# Altium PCB sheet2.PcbDoc
Units mm, origin at the board's own origin, x right, y up, seen from the top; angles counter-clockwise.
Board outline 50.13 x 51.93 mm, 2 copper layers (Top Layer, Bottom Layer); 47 components, 37 nets, 178 pads, 65 vias.
Unrouted connection lines stored in the file: 3.
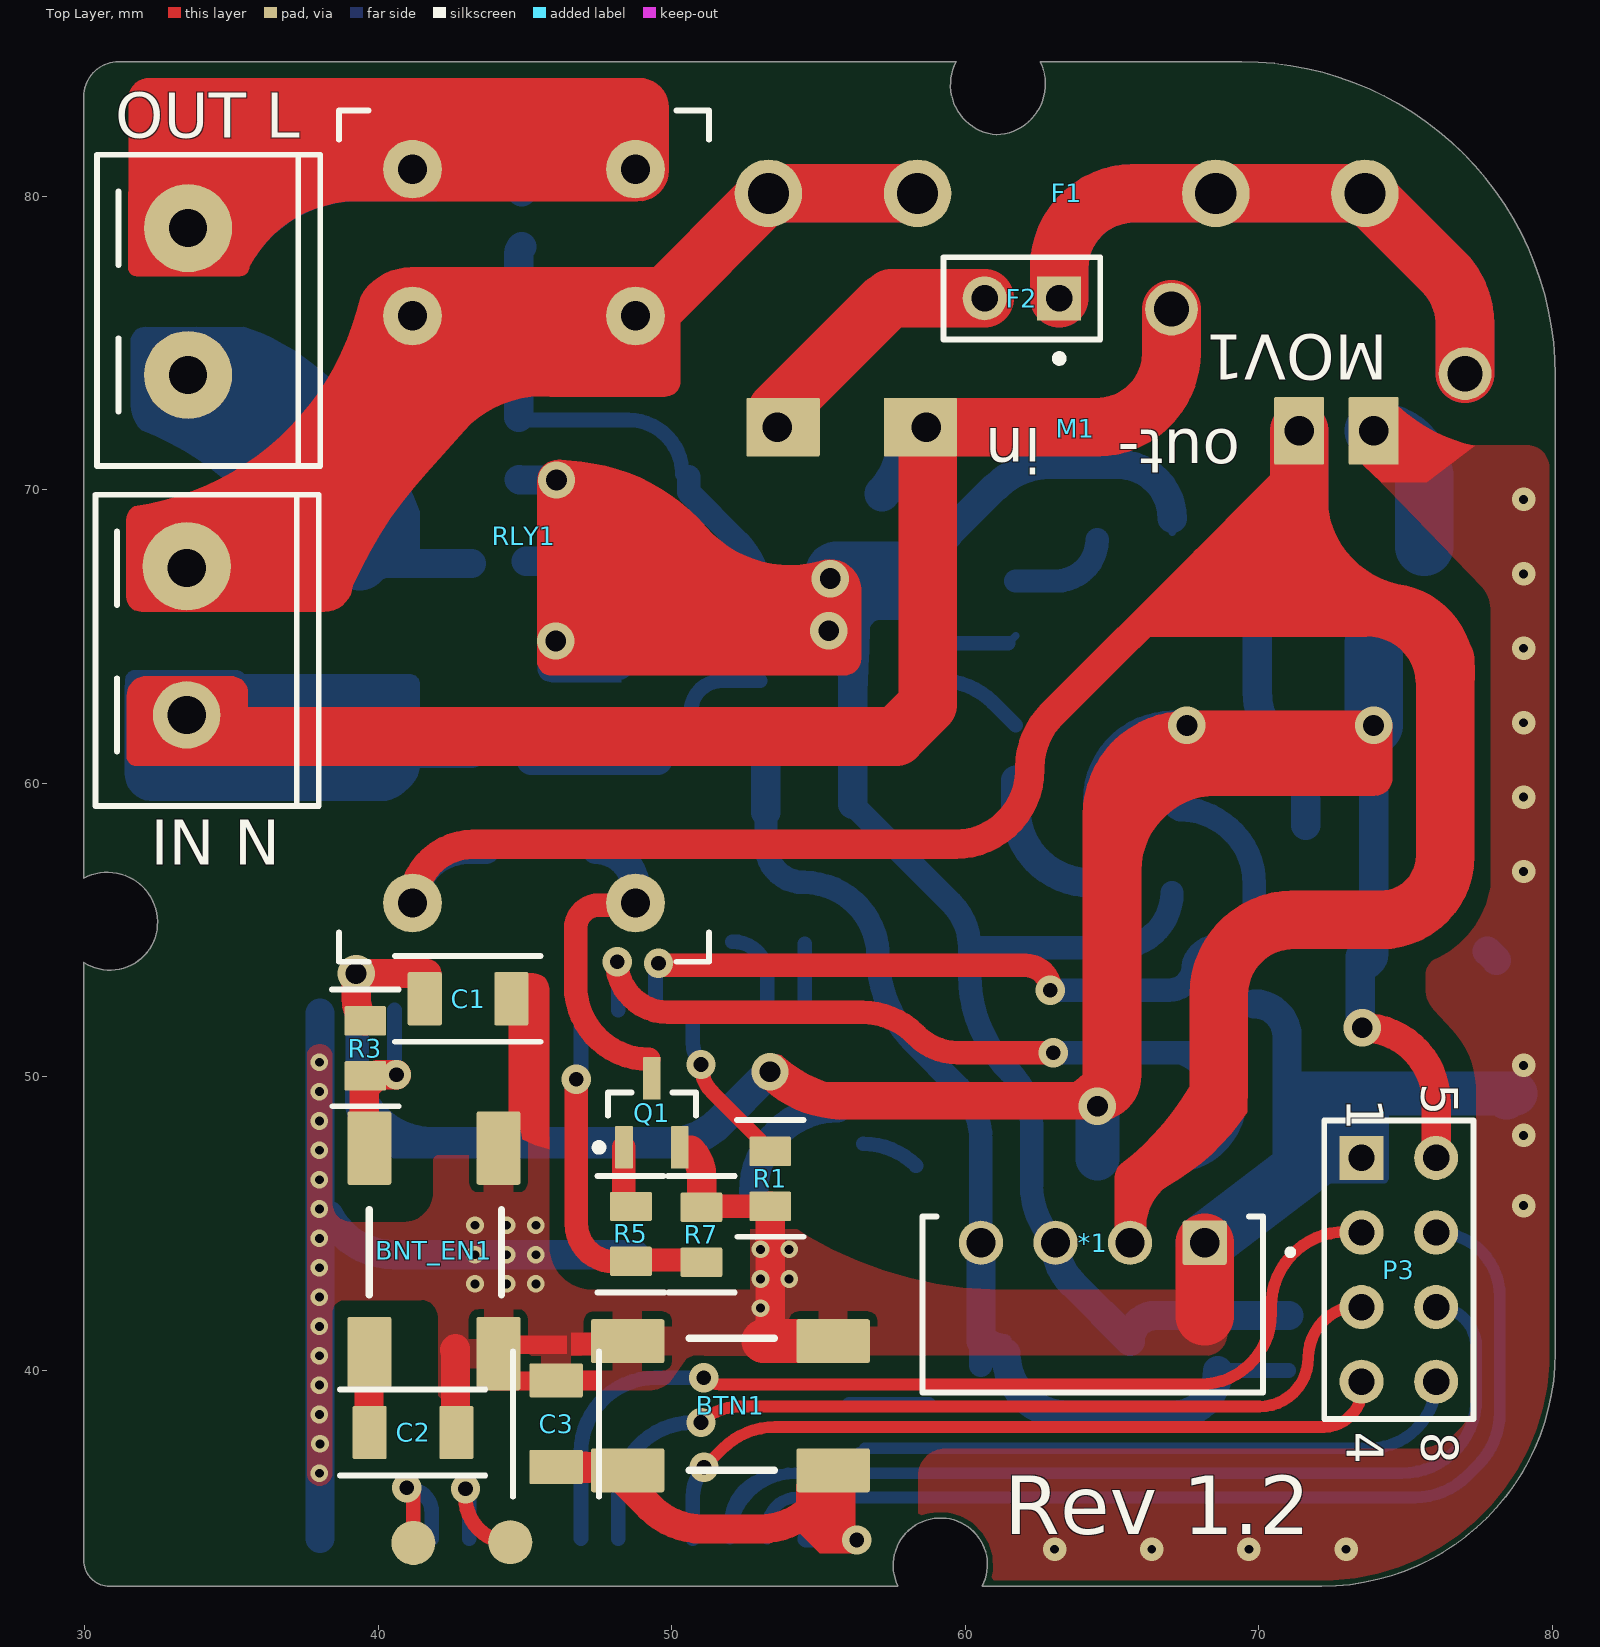
[diagram p0: Top Layer view]
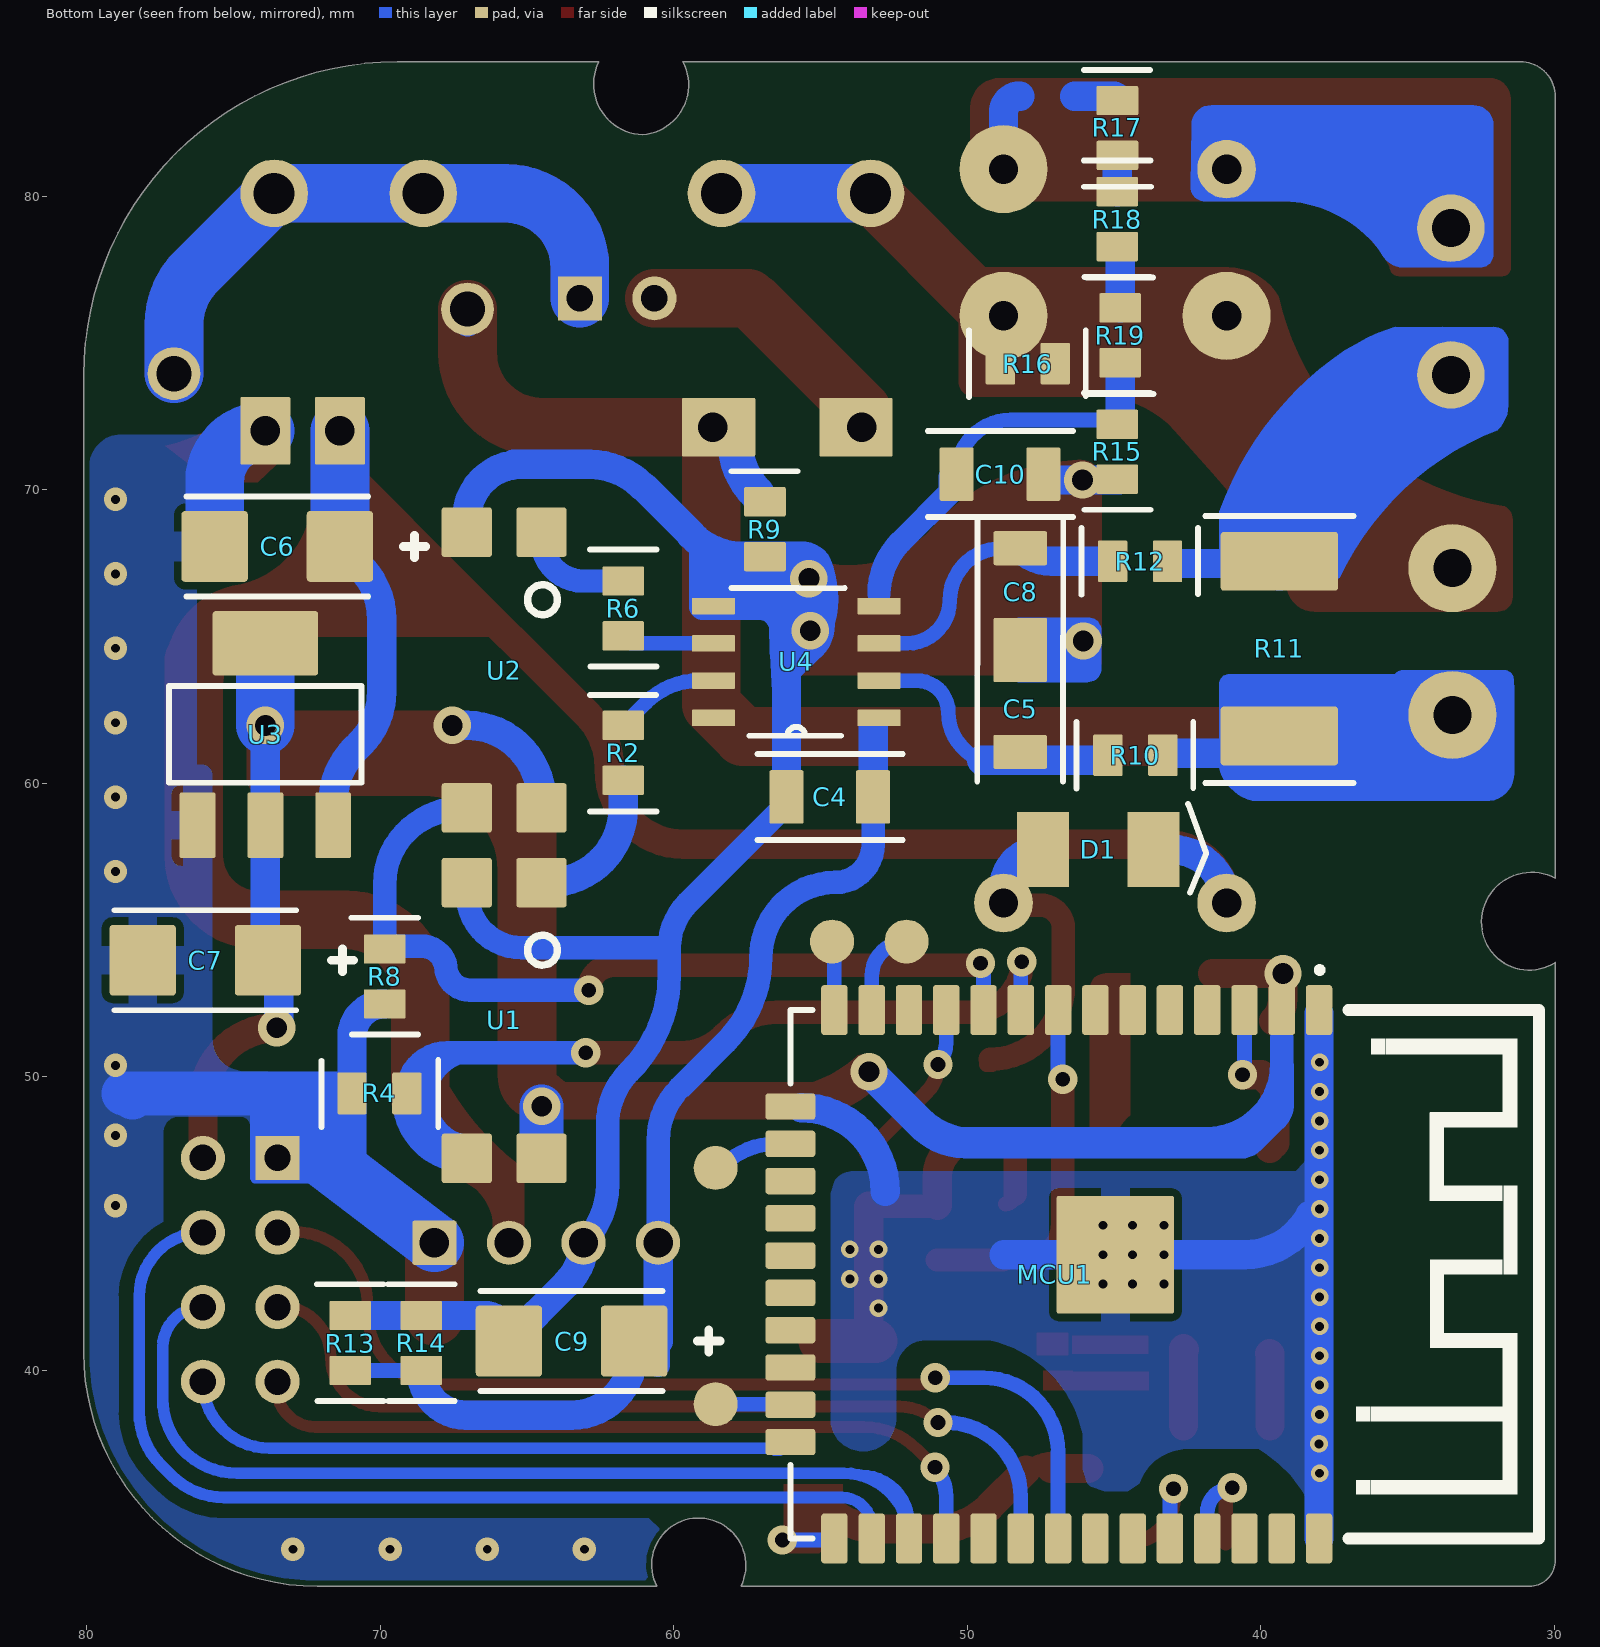
[diagram p1: Bottom Layer view, seen from below]

## Layer stack, top to bottom
Top Solder: solder mask 0.0102, Solder Resist, Dk 3.5
Top Layer: signal copper 0.0356
Dielectric 1: dielectric 0.32, FR-4, Dk 4.8
Bottom Layer: signal copper 0.0356
Bottom Solder: solder mask 0.0102, Solder Resist, Dk 3.5

## Board outline
30.922,32.653 57.709,32.653 cw(c59.161,33.36) 59.219,34.974 cw(c59.161,33.381) 60.579,32.653 72.15,32.65 ccw(c72.15,40.6) 80.1,40.6 80.1,73.9 ccw(c69.418,73.9) 69.418,84.582 62.56,84.582 cw(c60.992,83.831) 61.062,82.093 cw(c61.202,83.793) 59.69,84.582 31.157,84.582 ccw(c31.157,83.397) 29.972,83.397 29.972,56.769 cw(c30.779,55.263) 32.487,55.296 cw(c30.858,55.265) 29.972,53.899 29.972,33.528 ccw(c30.85,33.528)

## Design rules (kind name [scope] priority, off if disabled: settings)
BoardOutlineClearance [All] p1: gap=0.2 ignorepadtopadclearanceinfootprint=FALSE except(0.4: Arc-SplitBarrior Arc-SplitContinuation Track-SplitBarrior Track-SplitContinuation SMDPad-SplitBarrior SMDPad-SplitContinuation THPad-SplitBarrior THPad-SplitContinuation Via-SplitBarrior Via-SplitContinuation Fill-SplitBarrior Fill-SplitContinuation Poly-SplitBarrior Poly-SplitContinuation Region-SplitBarrior Region-SplitContinuation Text-SplitBarrior Text-SplitContinuation)
Clearance "Clearance Bottom Layer" [OnLayer('Bottom Layer')] p1: gap=0.203 ignorepadtopadclearanceinfootprint=TRUE except(0.254: Arc-Text Track-Text SMDPad-Text THPad-Text Via-Text Fill-Text Poly-Text Region-Text Text-Text; 0.5: Arc-Poly Track-Poly)
Clearance "Clearance Top Layer" [OnLayer('Top Layer')] p2: gap=0.203 ignorepadtopadclearanceinfootprint=TRUE except(0.254: Arc-Text Track-Text SMDPad-Text THPad-Text Via-Text Fill-Text Poly-Text Region-Text Text-Text; 0.5: Arc-Poly Track-Poly)
Clearance [All] p3: gap=0.2 ignorepadtopadclearanceinfootprint=FALSE except(0.089: Arc-Arc Arc-Track Arc-SMDPad Track-Track Track-SMDPad SMDPad-SMDPad; 0.127: Arc-Via Track-Via SMDPad-Via THPad-Via Via-Via; 0.254: Arc-Text Track-Text SMDPad-Text THPad-Text Via-Text Fill-Text Poly-Text Region-Text Text-Text)
HoleSize [All] p1: absolutevalues=TRUE maxlimit=6.3 minlimit=0.2 maxpercent=80.000 minpercent=20.000
MinimumAnnularRing [All] p1: minimumring=0.076
MinimumSolderMaskSliver [All] p1: minsoldermaskwidth=0.1
PlaneConnect [All] p1: pad.planeconnectstyle=Relief pad.reliefexpansion=0.508 pad.reliefentries=4 pad.reliefconductorwidth=0.5 pad.reliefairgap=0.254 via.planeconnectstyle=Direct via.reliefexpansion=0.508 via.reliefentries=4 via.reliefconductorwidth=0.4 via.reliefairgap=0.254
PolygonConnect PolygonConnect_1 [All] p1: thpad.connectstyle=Relief thpad.reliefconductorwidth=0.508 thpad.reliefentries=4 thpad.polygonreliefangle="90 Angle" thpad.airgapwidth=0.254 smdpad.connectstyle=Relief smdpad.reliefconductorwidth=1 smdpad.reliefentries=4 smdpad.polygonreliefangle="90 Angle" smdpad.airgapwidth=0.254 via.connectstyle=Direct via.reliefconductorwidth=0.508 via.reliefentries=4 via.polygonreliefangle="90 Angle" via.airgapwidth=0.254
RoutingCorners [All] p1: cornerstyle=Round minsetback=2.54 maxsetback=2.54
RoutingVias [All] p1: holewidth=0.5 width=1 viastyle="Through Hole" minholewidth=0.2 minwidth=0.45 maxholewidth=1 maxwidth=2
SilkToSilkClearance [All] p1: silktosilkclearance=0.1
SilkToSolderMaskClearance [IsPad] p1: minsilkscreentomaskgap=0.1 clearancetoexposedcopper=TRUE
SolderMaskExpansion [All] p1: expansion=0.102
Width [All] p1: maxlimit=6 minlimit=0.089 preferedwidth=0.381
24 further rules are at their usual default settings.

## Components (designator, comment, footprint, x,y, rotation, side; value= is the part's Value field where it differs from the comment)
*1 "b0505s-1w" B0505S 64.37,42.275 r180 top
BNT_EN1 "BTN" BUTTON 39.7,40.575 r90 top
BTN1 "BTN" BUTTON 55.5,36.6 r180 top
C1 "Cap Semi" "1206 CAP" 43.075,52.65 r0 top value=100nF
C2 "Cap Semi" "1206 CAP" 41.2,37.875 r0 top value=100nF
C3 "Cap Semi" "1206 CAP" 46.075,38.2 r90 top value=100nF
C4 "Cap Semi" "1206 CAP" 54.7,59.55 r0 bottom value=100nF
C5 "Cap Semi" "1206 CAP" 48.187,62.562 r90 bottom value=100nF
C6 "Cap Pol2" "2312 CAP TANT" 73.508,69.952 r0 bottom value=10uF
C7 "Cap Pol2" "2312 CAP TANT" 75.959,55.855 r0 bottom value=10uF
C8 "Cap Semi" "1206 CAP" 48.184,66.548 r90 bottom value=100nF
C9 "Cap Pol2" "2312 CAP TANT" 63.484,42.88 r0 bottom value=10uF
C10 "Cap Semi" "1206 CAP" 48.9,70.55 r0 bottom value=100nF
D1 "Diode 1N4148" DO214-AC 45.466,57.912 r180 bottom
F1 "0.2 A" "FUSE HOLDER MINI" 53.295,80.1 r0 top
F2 "100 C" PIN2 63.2,76.525 r180 top
"IN N" "Header 2" KF301-2P 33.477,67.332 r270 top (schematic designator P2)
M1 "wx-dc12003" WX-DC12003_HORIZ 73.914,71.628 r180 top
MCU1 "esp32-wroom" ESP32-WROOM 45.593,44.069 r270 bottom
MOV1 "Res Varistor" S20K250 66.802,73.406 r0 top
"OUT L" "Header 2" KF301-2P 33.528,78.914 r270 top (schematic designator P1)
P3 "Header 4X2A" HDR2X4_CEN 73.5,47.24 r270 top
Q1 "2n7002" SOT23 49.325,48.775 r90 top
R1 "Res2" "0805 RES" 53.294,46.555 r270 top value=0
R2 "Res2" "0805 RES" 61.659,61.014 r90 bottom value=1K
R3 "Res2" "0805 RES" 39.5,51 r270 top value=1K
R4 "Res2" "0805 RES" 70,49.5 r0 bottom value=1K
R5 "Res2" "0805 RES" 48.675,44.625 r90 top value=300R
R6 "Res2" "0805 RES" 61.785,65.986 r270 bottom value=1K
R7 "Res2" "0805 RES" 50.95,44.65 r270 top value=10K
R8 "Res2" "0805 RES" 69.913,53.448 r270 bottom value=1K
R9 "Res2" "0805 RES" 56.833,68.634 r90 bottom value=0
R10 "Res2" "0805 RES" 44.304,60.897 r180 bottom value=1K
R11 "Res2" "2512 RES" 39.37,67.739 r270 bottom value=0.001R
R12 "Res2" "0805 RES" 44.142,67.501 r180 bottom value=1K
R13 "21ma load" "0805 RES" 71.088,40.962 r270 bottom value=470R
R14 "Res2" "0805 RES" 68.663,40.962 r270 bottom value=470R
R15 "Res2" "0805 RES" 44.958,71.323 r270 bottom value=1K
R16 "Res2" "0805 RES" 47.967,74.237 r180 bottom value=470K
R17 "Res2" "0805 RES" 44.825,82.3 r90 bottom value=470K
R18 "Res2" "0805 RES" 44.958,79.248 r270 bottom value=470K
R19 "Res2" "0805 RES" 44.73,75.238 r90 bottom value=470K
RLY1 "relay" SMIH-05VDC-SL-A 41.168,55.925 r90 top
U1 "Optoisolator1" PC817-SMD 68.072,55.118 r270 bottom
U2 "Optoisolator1" PC817-SMD 68.072,67.056 r270 bottom
U3 "ams1117" AMS1117 73.973,61.711 r180 bottom
U4 "hlw8032" HLW8032 55.478,60.822 r0 bottom

## Footprints (in the part's own frame and the unit in brackets; to place one, negate y for a bottom-side part, rotate by r counter-clockwise, add the part's x,y. Pads: shape width x height; smd on the part's side, far side on the other; paste and mask are expansions set on the pad)
"0805 RES" [mm]
  rrect10% 1x1.42 smd: 1(-0.908,0.063) 2(0.962,0.063)
  silkscreen extent -1.98,-1.08 2,1.2, body extent -1.02,-0.52 0.98,0.68, height 1.6
"1206 CAP" [mm]
  rrect10% 1.16x1.82 smd: 1(-1.487,0.013) 2(1.463,0.013)
  silkscreen extent -2.5,-1.45 2.45,1.48, body extent -1.71,-0.86 1.66,0.91, height 1.6
"2312 CAP TANT" [mil]
  rrect10% 89x95 smd: 1(-84,74.02) 2(84,74.02)
  silkscreen extent -199,7 122,141, body extent -118,10 118,138, height 102
"2512 RES" [mm]
  rrect10% 2x4 smd: 1(0.175,0) 2(6.125,0)
  silkscreen extent -1.37,-2.52 7.73,2.52, body extent 0,-1.6 6.3,1.6, height 1.6
AMS1117 [mil]
  rrect10% 48x88 smd: 1(-88.68,-123.57) 2(2.32,-123.57) 3(93.32,-123.57)
  rrect10% 141.73x86.61 smd: 2(2.32,120.43)
  silkscreen extent -127,-67 131,63, body extent -128,-136 128,134, height 79
B0505S [mm]
  rrect10% 1.508x1.508 hole 1: 1(-3.785,-2.075)
  round 1.508 hole 1: 2(-1.245,-2.075) 3(1.295,-2.075) 4(3.835,-2.075)
  silkscreen extent -6.81,-2.97 5.83,3.03, body extent -5.79,-2.75 5.82,2.83, height 10
BUTTON [mm]
  rrect10% 2.5x1.5 smd: 1(0,0) 1(7,0) 2(0,-4.4) 2(7,-4.4)
  silkscreen extent 2,-4.5 4.9,0, body extent 0.35,-5.35 6.6,0.9, height 2.6
DO214-AC [mm]
  rect 1.78x2.54 smd: 1(-1.956,-0.165) 2(1.804,-0.165)
  silkscreen extent 2.99,-1.63 3.61,1.39, body extent -1.96,-1.02 2.06,0.67, height 2.1
ESP32-WROOM [mm]
  rrect22% 1.7x0.9 smd: 1(-8.208,7.574) 2(-8.208,6.304) 3(-8.208,5.034) 4(-8.208,3.764) 5(-8.208,2.494) 6(-8.208,1.224) 7(-8.208,-0.046) 8(-8.208,-1.316) 9(-8.208,-2.586) 10(-8.208,-3.856) 11(-8.208,-5.126) 12(-8.208,-6.396) 13(-8.208,-7.666) 14(-8.208,-8.936) 25(9.792,-8.936) 26(9.792,-7.666) 27(9.792,-6.396) 28(9.792,-5.126) 29(9.792,-3.856) 30(9.792,-2.586) 31(9.792,-1.316) 32(9.792,-0.046) 33(9.792,1.224) 34(9.792,2.494) 35(9.792,3.764) 36(9.792,5.034) 37(9.792,6.304) 38(9.792,7.574)
  rrect3% 4x4 smd: 1.1(0.127,0.635)
  rrect22% 0.9x1.7 smd: 15(-4.923,-10.436) 16(-3.653,-10.436) 17(-2.383,-10.436) 18(-1.113,-10.436) 19(0.157,-10.436) 20(1.427,-10.436) 21(2.697,-10.436) 22(3.967,-10.436) 23(5.237,-10.436) 24(6.507,-10.436)
  silkscreen extent -9.67,-10.43 9.79,15.07, body extent -8.4,-10.27 9.9,15.26, height 2
"FUSE HOLDER MINI" [mm]
  round 2.3 hole 1.4: 1(0,0) 1(5.08,0) 2(15.24,0) 2(20.32,0)
  body extent -0.25,-2.75 20.49,2.75, height 10.5
HDR2X4_CEN [mm] "Connector; Header; 4x2 Position"
  rect 1.5x1.5 hole 0.9: 1(0,0)
  round 1.5 hole 0.9: 2(2.54,0) 3(5.08,0) 4(7.62,0) 5(0,2.54) 6(2.54,2.54) 7(5.08,2.54) 8(7.62,2.54)
  silkscreen extent -1.27,-1.27 8.89,3.81
HLW8032 [mil]
  rrect10% 58x22 smd: 1(-97.18,-55.43) 2(-97.18,-105.43) 3(-97.18,-155.43) 4(-97.18,-205.43) 5(124.82,-205.43) 6(124.82,-155.43) 7(124.82,-105.43) 8(124.82,-55.43)
  silkscreen extent -51,-229 78,-31, body extent -64,-230 91,-32, height 59
KF301-2P [mm]
  round 2.3 hole 1.3: 1(0,0) 2(5,0)
  silkscreen extent -2.5,-3.1 8.1,4.5, body extent -2.5,-3.1 8.1,4.5, height 11
PC817-SMD [mm]
  rrect10% 1.68x1.71 smd: 1(-1.5,3.56) 2(-1.5,1.02) 3(7.89,1.02) 4(7.89,3.56)
  silkscreen extent 0.29,3.09 1.31,4.11, body extent 0,0 6.5,4.6, height 3.5
PIN2 [mm]
  rect 1.5x1.5 hole 0.9: 1(0,0)
  round 1.5 hole 0.9: 2(2.54,0)
  silkscreen extent -1.4,-1.4 3.94,2.17
S20K250 [mm]
  round 1.8 hole 1.2: 1(10.225,0.55) 2(0.225,2.75)
  body extent -3.6,0.05 13.4,3.25, height 20.5
SMIH-05VDC-SL-A [mm]
  round 2 hole 1: 0(0,-7.6) 1(0,0) 2(20,-7.6) 2(20,0) 3(25,-7.6) 3(25,0)
  silkscreen extent -2,-10.1 27,2.5, body extent -2,-10.07 27,2.53, height 21
SOT23 [mm]
  rrect10% 1.45x0.6 smd: 1(-1.175,0.95) 2(-1.175,-0.95) 3(1.175,0)
  silkscreen extent -1.3,-1.5 0.7,1.92, body extent -0.7,-1.5 0.7,1.5, height 1.1
WX-DC12003_HORIZ [mm]
  rrect5% 1.7x2.3 hole 1: 1(0,-0.381) 2(2.54,-0.381)
  rrect5% 2.5x2 hole 1 copper offset 0.2,0: 3(15.24,-0.508)
  rrect5% 2.5x2 hole 1 copper offset -0.2,0: 4(20.32,-0.508)
  body extent -2,-1.72 21.47,16.78, height 11.6

## Part data
C1 C2 C3 C4 C5 C8 C10: "Capacitor (Semiconductor SIM Model)", LatestRevisionDate=29-May-2009, LatestRevisionNote="IPC-7351 Footprint Added.", PackageDescription="Chip Capacitor", Published=8-Jun-2000, Publisher="Altium Limited"
C6 C7 C9: "Polarized Capacitor (Axial)", LatestRevisionDate=17-Jul-2002, LatestRevisionNote="Re-released for DXP Platform.", PackageDescription="Polarized Capacitor; 2 Leads", PackageReference=POLAR0.8, Published=8-Jun-2000, Publisher="Altium Limited"
D1: "High Conductance Fast Diode", Code_JEDEC=DO-204-AH, ComponentLink1Description="Manufacturer Link", ComponentLink1URL=http://www.fairchildsemi.com/, ComponentLink2Description=Datasheet, ComponentLink2URL=http://www.fairchildsemi.com/ds/1N%2F1N4148.pdf, DatasheetVersion=1997, LatestRevisionDate=17-Jul-2002, LatestRevisionNote="Re-released for DXP Platform.", PackageDescription="Diode, Axial; Body 3.8 x 1.9 mm (LxDia. max), Lead Dia. 0.53 mm (max)", PackageReference=DO-35, Published=8-Jun-2000, Publisher="Altium Limited"
F1 F2: library part "Fuse 2", "Fuse", LatestRevisionDate=17-Jul-2002, LatestRevisionNote="Re-released for DXP Platform.", PackageDescription="Thru-Hole; 2 Leads", PackageReference=PIN-W2/E2.8, Published=8-Jun-2000, Publisher="Altium Limited"
"IN N" "OUT L": "Header, 2-Pin", LatestRevisionDate=17-Jul-2002, LatestRevisionNote="Re-released for DXP Platform.", Publisher="Altium Limited"
MOV1: "Varistor (Voltage-Sensitive Resistor)", Code_IPC=RESC2012, LatestRevisionDate=29-May-2009, LatestRevisionNote="IPC-7351 Footprint Added.", PackageDescription="Chip Resistor 0805 Case Size", PackageReference=6-0805, PackageVersion=Mar-2003, Published=24-Mar-1999, Publisher="Altium Limited"
P3: "Header, 4-Pin, Dual row", LatestRevisionDate=17-Jul-2002, LatestRevisionNote="Re-released for DXP Platform.", Publisher="Altium Limited"
Q1: library part MOSFET-N, "N-Channel MOSFET", LatestRevisionDate=17-Jul-2002, LatestRevisionNote="Re-released for DXP Platform.", PackageDescription="TO, Flat Index; 3 In-Line, Axial Leads; Body Dia. 4.6mm; Lead Dia. 0.5 mm (max)", PackageReference=E3, PackageVersion=1995/1996, Published=8-Jun-2000, Publisher="Altium Limited"
R1 R2 R3 R4 R5 R6 R7 R8 R9 R10 R11 R12 R14 R15 R16 R17 R18 R19: "Resistor", LatestRevisionDate=17-Jul-2002, LatestRevisionNote="Re-released for DXP Platform.", PackageDescription="Axial Device, Thru-Hole; 2 Leads; 0.4 in Pin Spacing", PackageReference=AXIAL-0.4, Published=8-Jun-2000, Publisher="Altium Limited"
R13: library part Res2, "20ma minimum load resistor", LatestRevisionDate=17-Jul-2002, LatestRevisionNote="Re-released for DXP Platform.", PackageDescription="Axial Device, Thru-Hole; 2 Leads; 0.4 in Pin Spacing", PackageReference=AXIAL-0.4, Published=8-Jun-2000, Publisher="Altium Limited"
U1 U2: "4-Pin Phototransistor Optocoupler", DatasheetVersion=Nov-2003, LatestRevisionDate=04-Mar-2005, LatestRevisionNote="Sch pins 3 & 4 Swapped.", PackageReference=DIP-4, Published=24-Mar-1999, Publisher="Altium Limited"

## Free pads (board coordinates)
  round 1.5 smd far side: 4(58.575,46.9) 5(58.575,38.85) 31(52.07,54.61) 32(54.61,54.61)
  round 1.5 smd: 12(41.2,34.125) 13(44.5,34.15)
  round 3 smd: 26(33.48,67.396) 26(33.528,73.914) 27(33.528,78.914)
  round 3 smd far side: 28(33.477,67.332) 28(41.168,75.925) 28(48.768,75.925) 28(48.768,80.925) 29(33.477,62.332)

## Via types
v1: diameter 0.6/0.6 (per signal layer), hole 0.3, Top Layer to Bottom Layer, tented both sides, 20 vias
v2: diameter 1, hole 0.5, Top Layer to Bottom Layer, tented both sides, 13 vias
v3: diameter 0.8/0.8 (per signal layer), hole 0.3, Top Layer to Bottom Layer, tented both sides, 13 vias
v4: diameter 1.27, hole 0.711, Top Layer to Bottom Layer, tented both sides, 10 vias
v5: diameter 0.6/0.6 (per signal layer), hole 0.3, Top Layer to Bottom Layer, 9 vias

## Nets (pads, with @x,y where several pads share a name; then routed paths per layer and width w, separated by ;. In a path a pad name is that pad's centre, name@x,y a point inside that pad or via, vN(x,y) a via of type N, cw(c..) or ccw(c..) an arc to the next point about the centre after c; other vN are vias at no path point)
+3V3: C1.1 C7.1 MCU1.2 P3.5 R3.1 U1.4 U2.4 U3.2 | length 82.3
  Top Layer w1: R3.1 cw(c40.319,52.664) 39.25,52.664 v4(39.25,53.525) C1.1@41.65,53.525 ; 54.775,49.35 54.8,49.325 64.175,49.325 v4(64.5,49) 64.5,58.927 cw(c67.549,58.927) v4(67.549,61.976) v4(73.914,61.976) ; v4@73.8,51.675 v4(73.525,51.675) cw(c73.525,49.16) 76.04,49.16 P3.5
  Bottom Layer w0.254: U1.4@64.5,47.24 U1.4
  Bottom Layer w0.5: 39.292,51.333 MCU1.2@39.292,52.277
  Bottom Layer w0.6: 41.829,47.9 41.832,47.9
  Bottom Layer w0.7: 49.748,47.9 ccw(c49.748,50.44) 51.544,48.644 v4@53.275,50.375 ; v4@53.275,50.4 53.35,50.325 v4(53.35,50.175)
  Bottom Layer w0.8: v4(39.25,53.525) v4@39.25,53.75 ; 39.289,51.333 39.289,50.44 ccw(c41.829,50.44) 41.829,47.9 ; MCU1.2 v4@39.289,53.711 ; 41.832,47.9 49.748,47.9 50.521,47.9
  Bottom Layer w1: v4(64.5,49) v4@64.512,48.988 ; U2.4 64.512,59.436 cw(c67.052,59.436) 67.052,61.976 v4(67.549,61.976) ; C7.1@73.457,54.102 73.457,51.743 ccw(c73.525,51.743) v4(73.525,51.675) ; C7.1@73.525,53.8 ccw(c73.525,54.189) 73.914,54.189 73.914,58.572 v4(73.914,61.976)
  Bottom Layer w1.5: U1.4 v4@64.512,48.988
  Bottom Layer w2: v4(73.914,61.976) U3.2@73.914,64.77
+5V: *1.2 C6.1 D1.2 M1.2 RLY1.1 U3.3 | length 87.1
  Top Layer w1: RLY1.1@41.168,55.852 cw(c43.241,55.852) 43.241,57.925 59.66,57.925 ccw(c59.66,60.465) 62.2,60.465 62.2,60.548 cw(c64.74,60.548) 62.944,62.344 68.182,67.582 cw(c69.978,65.786) 69.978,68.326 70.975,68.326 ; *1.2 65.615,46.465 ; 67.012,47.862 ccw(c67.012,49.488) 68.638,49.488 ; 71.374,68.326 70.975,68.326 ; M1.2 ccw(c72.337,71.046) 70.975,71.046 70.975,68.326
  Top Layer w2: 68.638,49.488 68.638,52.81 cw(c71.178,52.81) 71.178,55.35 74.168,55.35 ccw(c74.168,57.534) 76.352,57.534 76.352,64.2 ; 71.374,68.326 M1.2
  Bottom Layer w1: RLY1.1@41.168,55.852 cw(c43.063,55.852) 43.063,57.747 D1.2 ; 70.65,61.375 70.692,61.333 ; C6.1 70.694,67.392 ccw(c72.49,65.596) 70.425,67.075 ccw(c72.49,65.596) 69.95,65.596 69.95,63.127 ccw(c72.49,63.127) 70.678,61.347 ccw(c72.49,63.127) 70.692,61.333 ; U3.3 71.603,59.37 ccw(c69.063,59.37) 70.859,61.166 70.692,61.333
  Bottom Layer w2: C6.1 M1.2
+5V_HLW: *1.4 C4.1 C9.1 R13.2 R14.2 U4.1 | length 38.8
  Bottom Layer w0.5: 56.976,54.624 cw(c54.494,54.085) 57.001,54.494 ; 59.791,49.627 cw(c57.995,47.83) 59.981,49.414 ; C9.1@60.535,41.815 ccw(c61.35,41.815) C9.1 ccw(c63.875,41) C9.1@61.385,40.581 ; R14.2 R13.2
  Bottom Layer w0.8: C4.1@53.213,59.287 53.213,57.907 ccw(c54.494,57.907) 54.494,56.625 cw(c54.494,54.085) 55.033,56.567 cw(c54.494,54.085) 56.976,54.624 ; 57.001,54.494 cw(c54.494,54.085) 57.034,54.085 ccw(c61.142,54.085) 58.237,51.18 59.791,49.627 ; 59.981,49.414 cw(c57.995,47.83) 60.404,48.635 cw(c57.995,47.83) 60.535,47.83 *1.4 ; C9.1@60.535,40.175 C9.1@60.535,41
  Bottom Layer w1: C4.1@53.21,59.012 U4.1@53.21,61.955 ; C9.1@60.535,41 60.535,41.815 *1.4 ; C9.1@61.385,40.581 ccw(c63.491,40.581) 63.491,38.475 67.075,38.475 ccw(c67.075,40) R14.2
CHIP_EN: BNT_EN1.1 C2.1 MCU1.3 R3.2 | length 7.9
  Top Layer w1: C2.1@39.688,38.113 39.688,40.563 BNT_EN1.1@39.7,40.575 ; BNT_EN1.1@39.7,47.575 39.525,47.75 39.525,49.613 39.987,50.075 v2(40.625,50.075)
  Bottom Layer w0.5: v2@40.559,50.271 MCU1.3
espRX: MCU1.34 pad.13 | length 4.3
  Top Layer w0.5: v2(42.975,35.975) 42.975,35.675 ccw(c44.5,35.675) pad.13
  Bottom Layer w0.5: MCU1.34 v2@43.099,35.851
espTX: MCU1.35 pad.12 | length 4.2
  Top Layer w0.5: v2(40.975,36) cw(c40.975,35.775) 41.2,35.775 pad.12
  Bottom Layer w0.5: v2(40.975,36) cw(c40.975,35.146) 41.829,35.146 MCU1.35
GND: *1.1 BNT_EN1.2 BTN1.2 C1.2 C2.2 C3.2 C6.2 C7.2 M1.1 MCU1.1 MCU1.1.1 MCU1.15 MCU1.38 P3.1 Q1.2 R1.2 R4.2 R7.1 R8.2 U3.1 | length 75.7
  Top Layer w0.5: R7.1@51.025,45.593 R7.1@51.025,45.633
  Top Layer w0.8: R7.1@51.025,45.593 R1.2
  Top Layer w1: 42.6,40.7 42.638,40.737 C2.2@42.638,38.113 ; 50.65,47.5 cw(c49.745,46.595) 51.025,46.595 R7.1@51.025,45.633 ; R1.2 53.363,45.587 53.363,43.117 53.363,41.625
  Top Layer w1.5: 53.125,41 BTN1.2@55,41 ; 68.025,41.725 ccw(c68.025,41.855) 68.155,41.855
  Top Layer w2: 68.155,41.855 *1.1
  Bottom Layer w0.254: *1.1@68.01,44.349 *1.1@68.155,44.349
  Bottom Layer w1: MCU1.38 v1(38.019,37.5) 38.019,40.5 38.019,42.5 38.019,48.5 38.019,50.5 MCU1.1@38.019,52.169 ; 38.313,45.295 ccw(c40.559,46.482) 40.559,43.942 v5(43.3,43.942) v5(44.375,43.942) MCU1.1.1 v5(45.375,43.942) 48.75,43.942 ; 52.796,46.096 cw(c55.65,46.096) MCU1.15@55.65,48.95 ; *1.1@68.155,44.349 *1.1@68.561,44.349 ; R8.2 cw(c69.85,51.374) 70.962,51.374 R4.2 70.962,46.75 ; 73.625,49.437 73.823,49.437 ccw(c73.823,49.652) 73.975,49.5 ; C7.2@77.783,54.284 C7.2
  Bottom Layer w1.5: 72.926,47.992 73.625,48.525 ; P3.1@73.625,47.24 73.625,48.525 ; 73.71,49.352 cw(c73.71,49.437) 73.625,49.437 73.625,48.525 ; 73.823,49.437 78.74,49.437 ; 78.384,49.352 cw(c78.384,49.301) 78.435,49.301
  Bottom Layer w2: *1.1 72.926,47.992 ; M1.1 cw(c73.914,70.282) 75.641,70.282 C6.2
  other v1: 38,36.5 38,38.5 38,39.5 38,40.5 38,41.5 53.025,42.125 38,42.5 53.025,43.117 54,43.117 38,43.5 53.025,44.125 54,44.125 38,44.5 38,45.5 38,46.5 38,47.5 38,48.5 38,49.5 38,50.5
  other v3: 63.043,33.909 66.353,33.909 69.664,33.909 72.974,33.909 79.019,45.618 79.019,48.006 79.019,50.394 79.019,56.998 79.019,59.533 79.019,62.067 79.019,64.602 79.019,67.137 79.019,69.672
  other v5: 43.3,42.95 44.375,42.95 45.375,42.95 43.3,44.95 44.375,44.95 45.375,44.95
GND_HLW1: *1.3 C4.2 C5.2 C8.1 C9.2 C10.1 R9.1 R13.1 R14.1 R15.2 U1.2 U2.2 U4.5 | length 67.7
  Top Layer w1: v4@46.075,70.1 v4(46.075,70.333)
  Bottom Layer w0.254: U2.2 U2.2@67.052,69.021 ; R13.1@71.025,41.885 R13.1@71.275,41.885
  Bottom Layer w0.5: R15.2@44.826,70.333 ccw(c44.826,70.43) R15.2 ; v4(55.35,65.2) 55.35,64.875 55.245,64.77 cw(c55.245,63.852) 55.35,64.764 cw(c55.245,63.852) 56.163,63.852 ; 65.455,70.866 cw(c65.455,70.775) 65.519,70.839
  Bottom Layer w0.8: C4.2@56.163,59.287 59.517,55.933 cw(c57.984,54.4) 60.152,54.4 ; *1.3 cw(c65.048,46.323) 62.258,46.323 62.258,48.385 ccw(c59.718,48.385) 61.514,50.181 cw(c64.801,53.469) 60.152,53.469 60.152,54.4 ; U1.2@67.044,56.273 cw(c65.17,56.273) 65.17,54.4 60.152,54.4
  Bottom Layer w1: R15.2@44.809,70.35 44.826,70.333 v4(46.075,70.333) C10.1@46.939,70.333 ; C8.1 C5.2 ; v4@55.35,64.875 55.35,64.764 55.35,64.665 56.163,63.852 56.163,63.15 ; 55.88,64.77 55.88,64.85 cw(c57.095,64.85) 57.095,66.065 58.648,66.065 ccw(c56.988,66.065) R9.1@56.988,67.726 ; C4.2@56.163,59.287 C4.2 56.163,63.15 ; 56.275,65.675 56.252,65.16 56.233,64.726 56.163,63.15 ; 57.622,67.726 ccw(c57.622,70.266) 59.418,68.47 ; 59.368,68.445 61.02,70.097 ; 61.07,70.122 cw(c62.866,68.326) 62.866,70.866 65.455,70.866 ; *1.3 ccw(c65.025,44.35) 63.175,43.733 ccw(c65.025,44.35) 63.646,42.971 C9.2 cw(c66.487,41) 66.487,41.87 R14.1 R13.1 ; 65.519,70.839 cw(c65.207,69.021) U2.2@67.052,69.021
  other v4: 46.05,64.85 55.4,66.975
GPIO0: BTN1.1 C3.1 MCU1.25 | length 14.2
  Top Layer w0.5: 47.065,36.987 cw(c47.065,35.665) BTN1.1@48,36.6 ; 54.799,35.344 55.156,35.701 ccw(c57.54,36.577) 55.744,34.781 v2(56.3,34.225)
  Top Layer w1: C3.1@45.862,36.662 47.14,36.662 ; BTN1.1@48,36.6 49.256,35.344 ccw(c51.052,37.14) 51.052,34.6 53.003,34.6 ccw(c53.003,37.14) 54.799,35.344
  Bottom Layer w0.5: MCU1.25 ccw(c54.581,34.277) 54.581,34.225 v2(56.3,34.225)
GPIO2: MCU1.24 P3.8 | length 21
  Bottom Layer w0.3: MCU1.24@56.379,37.237 MCU1.24@56.575,37.237
  Bottom Layer w0.4: MCU1.24@56.575,37.35 73.77,37.35 ccw(c73.77,39.62) P3.8
GPIO4: MCU1.26 P3.6 | length 34.9
  Bottom Layer w0.4: MCU1.26 53.259,34.659 cw(c54.275,34.659) 53.51,35.328 cw(c54.275,34.659) 54.275,35.675 75.314,35.675 ccw(c75.314,38.215) 77.11,36.419 77.467,36.776 ccw(c75.671,38.572) 78.211,38.572 78.211,42.529 ccw(c76.04,42.529) P3.6
GPIO16: MCU1.27 P3.7 | length 35.7
  Bottom Layer w0.3: P3.7 cw(c76.04,40.375) P3.7@76.614,42.065
  Bottom Layer w0.4: 53.625,36.425 ccw(c53.625,34.789) 51.989,34.789 MCU1.27 cw(c54.212,34.277) 54.212,36.5 74.872,36.5 ccw(c74.872,39.04) 77.412,39.04 77.412,40.788 ccw(c76.04,40.788) P3.7
GPIO17: MCU1.28 P3.4 | length 26.2
  Top Layer w0.4: v2(51.1,36.7) 51.731,37.331 cw(c53.527,35.535) 53.527,38.075 72.2,38.075 ccw(c72.2,39.4) 72.209,38.075 ccw(c72.2,39.4) P3.4@73.525,39.4
  Bottom Layer w0.5: MCU1.28 50.719,35.704 cw(c52.127,35.704) v2@51.131,36.7
GPIO18: MCU1.30 P3.3 | length 30.2
  Top Layer w0.4: v2(51,38.225) cw(c52.312,36.913) 52.312,38.768 70.018,38.768 ccw(c70.018,40.436) 71.686,40.436 cw(c73.45,40.436) P3.3@73.45,42.2
  Bottom Layer w0.5: MCU1.30 48.179,35.685 cw(c50.719,35.685) 50.719,38.225 v2(51,38.225)
GPIO19: MCU1.31 P3.2 | length 34
  Top Layer w0.4: v2(51.089,39.752) ccw(c51.637,40.3) 51.637,39.525 68,39.525 ccw(c68,41.95) 70.425,41.95 70.425,42.185 cw(c72.965,42.185) 72.965,44.725 P3.2@73.35,44.725
  Bottom Layer w0.5: MCU1.31 46.909,37.212 cw(c49.449,37.212) 49.449,39.752 v2(51.089,39.752)
GPIO26: MCU1.11 R1.1 | length 5.9
  Top Layer w0.5: v2(51,50.425) ccw(c52.356,50.425) 51.002,50.348 ccw(c52.356,50.425) 51.397,49.466 R1.1@53.442,47.422
  Bottom Layer w0.5: MCU1.11 50.719,51.166 ccw(c51.776,51.166) 51.022,50.425 ccw(c51.776,51.166) v2@51.029,50.419
GPIO32: MCU1.8 R5.1 R7.2 | length 11.8
  Top Layer w0.5: R5.1@48.712,43.8 ccw(c48.801,43.889) R5.1@48.801,43.763
  Top Layer w0.8: v2(46.75,49.925) 46.75,45 ccw(c48.05,45) R5.1@48.05,43.7 ; R5.1@48.801,43.763 R7.2@51.025,43.763
  Bottom Layer w0.5: v2@46.909,49.778 MCU1.8
hlwPF: MCU1.9 R4.1 U1.3 | length 28.2
  Top Layer w0.8: v2@48.125,53.95 ccw(c49.875,53.95) 49.875,52.2 56.498,52.2 cw(c56.498,49.66) 58.294,51.456 58.35,51.4 ccw(c59.738,52.788) 59.738,50.825 v2(63,50.825)
  Bottom Layer w0.254: v2(48.15,53.925) cw(c48.15,53.896) v2@48.179,53.896 ; R4.1@69.092,49.268 R4.1
  Bottom Layer w0.5: MCU1.9 v2@48.179,53.896
  Bottom Layer w0.8: v2(63,50.825) 67.704,50.825 cw(c67.704,49.437) R4.1
  Bottom Layer w1: U1.3 ccw(c67.052,49.268) R4.1@69.092,49.268
hlwTX: MCU1.10 R8.1 U2.3 | length 31.1
  Top Layer w0.5: v2(49.55,53.875) v2@49.575,53.875
  Top Layer w0.8: v2@49.575,53.8 62.05,53.8 cw(c62.05,52.95) v2(62.9,52.95)
  Bottom Layer w0.254: v2@49.449,53.774 cw(c49.55,53.774) v2(49.55,53.875)
  Bottom Layer w0.5: MCU1.10 v2@49.449,53.774 ; U2.3 U2.3@67.21,59.166 ; 67.75,53.602 ccw(c66.936,53.785) 67.77,53.785
  Bottom Layer w0.8: v2(62.9,52.95) 66.936,52.95 ccw(c66.936,53.785) 67.75,53.602 cw(c68.604,53.602) 68.604,54.456 R8.1@69.75,54.456 ; U2.3@67.21,59.166 cw(c67.21,56.626) 68.563,58.776 ; U2.3@67.325,59.1 cw(c67.325,56.575) 68.563,58.776 ; R8.1 69.85,56.575 ccw(c67.325,56.575) 68.563,58.776
LIVE: "IN N.1" F1.1 pad.26@33.48,67.396 pad.28@33.477,67.332 pad.28@41.168,75.925 pad.28@48.768,75.925 RLY1.2 | length 18.2
  Top Layer w0.254: 40.9,74.755 40.998,74.755 41.122,74.406
  Top Layer w1: F1.1@58.101,80.075 F1.1@58.42,79.756
  Top Layer w2: pad.26@33.477,67.332 ccw(c33.477,68.781) pad.26@34.502,67.756 ; RLY1.2@48.768,75.925 ccw(c48.768,76.775) 49.369,76.174 53.295,80.1 58.041,80.1 cw(c58.041,80.015) F1.1@58.101,80.075
  Bottom Layer w2: F1.1@53.295,80.1 F1.1@58.375,80.1
LIVEout: "OUT L.1" pad.27 pad.28@48.768,80.925 R16.1 RLY1.3 | length 3
  Bottom Layer w1: 48.208,83.413 cw(c48.208,82.853) 48.768,82.853 48.768,80.925 RLY1.3@48.889,81.046
NetC5_1: C5.1 R10.1 U4.2 | length 10.6
  Bottom Layer w0.5: C5.1@48.196,60.666 48.891,60.666 ccw(c48.891,62.425) 49.519,60.782 ; 49.684,60.855 ccw(c48.891,62.425) 50.65,62.425 cw(c51.725,62.425) 50.833,63.025 cw(c51.725,62.425) 51.125,63.317 cw(c51.725,62.425) 51.725,63.5 U4.2
  Bottom Layer w1: R10.1@45.212,60.782 49.519,60.782
NetC8_2: C8.2 R12.1 U4.3 | length 9.3
  Bottom Layer w0.5: C8.2@48.814,68.011 cw(c48.814,66.225) 50.6,66.225 ccw(c52.055,66.225) 52.055,64.77 U4.3
  Bottom Layer w1: R12.1 47.118,67.564 ccw(c47.118,69.089) C8.2
NetC10_2: C10.2 R15.1 R19.1 U4.4 | length 13.7
  Bottom Layer w0.5: R15.1@45.175,72.381 48.519,72.381 cw(c48.519,70.537) 49.343,72.187 cw(c48.519,70.537) C10.2@50.358,70.667 ; C10.2 ccw(c48.519,70.537) C10.2@50.358,70.667 ; C10.2@50.575,70.45 C10.2@50.358,70.667 ; U4.4 53.01,66.439
  Bottom Layer w0.8: C10.2@50.575,70.45 50.575,69.926 52.266,68.235 cw(c50.47,66.439) 53.01,66.439
  Bottom Layer w1: R15.1@44.793,72.476 R19.1
NetD1_1: D1.1 Q1.3 RLY1.0 | length 11.2
  Top Layer w0.5: Q1.3@49.15,50.425 Q1.3@49.35,50.425
  Top Layer w0.8: RLY1.0@48.768,55.852 47.527,55.852 ccw(c47.527,55.05) 46.725,55.05 46.725,53.1 ccw(c49.225,53.1) Q1.3@49.225,50.6
  Bottom Layer w1: D1.1 cw(c47.422,56.401) 48.768,56.401 RLY1.0 RLY1.0@48.768,55.852
NetF1_2: F1.2 F2.1 MOV1.1 | length 40.7
  Top Layer w2: F2.1 63.2,77.56 cw(c65.74,77.56) 64.445,79.745 cw(c65.74,77.56) 64.484,79.768 cw(c65.74,77.56) 65.74,80.1 68.535,80.1 73.615,80.1 76.283,77.432 cw(c74.487,75.636) 77.027,75.636 MOV1.1
  Bottom Layer w2: F2.1 63.2,77.56 cw(c65.74,77.56) 65.74,80.1 68.535,80.1 73.615,80.1 76.283,77.432 cw(c74.487,75.636) 77.027,75.636 MOV1.1
NetF2_2: F2.2 M1.4 | length 8.3
  Top Layer w2: M1.4@53.594,72.711 57.239,76.356 ; 57.475,76.525 F2.2
NetQ1_2: Q1.1 R5.2 | length 2.1
  Top Layer w0.5: R5.2@48.375,46.007 ccw(c48.712,46.007) R5.2@48.712,45.67
  Top Layer w0.8: R5.2@48.375,46.007 Q1.1
NetR2_1: R2.1 U1.1 | length 5.2
  Bottom Layer w0.5: U1.1@64.262,56.618 U1.1
  Bottom Layer w1: R2.1 61.722,59.158 ccw(c64.262,59.158) 62.169,57.719 ccw(c64.262,59.158) 62.823,57.065 ccw(c64.262,59.158) U1.1@64.262,56.618
NetR6_1: R6.1 U2.1 | length 3.8
  Bottom Layer w0.254: U2.1@64.493,68.303 ccw(c62.85,68.556) U2.1
  Bottom Layer w0.8: R6.1 63.084,66.894 ccw(c63.084,68.303) U2.1@64.493,68.303
NetR16_2: R16.2 R17.2 | length 1.5
  Bottom Layer w1: R17.2 cw(c45.039,83.262) 45.039,83.413 46.338,83.413
NetR17_1: R17.1 R18.1 | length 1.2
  Bottom Layer w1: R18.1 44.895,81.082 cw(c45.298,81.082) R17.1@45.013,81.367
NetR18_2: R18.2 R19.2 | length 2.5
  Bottom Layer w0.254: R18.2@44.793,78.041 R18.2@44.793,78.394
  Bottom Layer w1: R19.2 44.793,78.041 cw(c45.14,78.041) R18.2
NEUTRAL: "IN N.2" M1.3 MOV1.2 pad.29 R9.2 R10.2 R11.2 | length 51.1
  Top Layer w2: 33.479,61.6 57.65,61.6 58.725,62.675 58.725,72.136 64.487,72.136 ccw(c64.487,74.676) 67.027,74.676 MOV1.2
  Bottom Layer w1: R11.2@41.224,61.03 R10.2@43.18,61.03 ; MOV1.2@67.027,75.715 MOV1.2
  Bottom Layer w1.2: R9.2@57.168,69.868 ccw(c55.372,71.664) 57.912,71.664 M1.3@57.912,71.958
NEUTRALout: "OUT L.2" pad.26@33.528,73.914 R11.1 R12.2 | length 12.9
  Bottom Layer w0.254: 33.528,73.025 33.528,73.914 ; R11.1@39.751,67.945 R11.1@40.132,67.564
  Bottom Layer w1: R11.1@40.359,67.488 R12.2@43.18,67.488
  Bottom Layer w2: 33.528,73.914 R11.1
OPTO_hlwPF: R2.2 U4.7 | length 3.6
  Bottom Layer w0.5: U4.7 59.146,63.5 cw(c59.146,60.96) 60.942,62.756 R2.2
OPTO_hlwTX: R6.2 U4.6 | length 3.2
  Bottom Layer w0.254: R6.2@61.468,64.77 R6.2
  Bottom Layer w0.5: U4.6 R6.2@61.468,64.77
pads on no net: MCU1.4 MCU1.5 MCU1.6 MCU1.7 MCU1.12 MCU1.13 MCU1.14 MCU1.16 MCU1.17 MCU1.18 MCU1.19 MCU1.20 MCU1.21 MCU1.22 MCU1.23 MCU1.29 MCU1.32 MCU1.33 MCU1.36 MCU1.37 U4.8
copper on no net: | length 10
  Bottom Layer w0.5: 52.07,54.61 cw(c52.07,53.421) 53.259,53.421 53.259,52.277 ; 54.529,52.277 54.529,54.529 ; 56.047,38.85 58.75,38.85 ; 56.526,47.722 cw(c56.526,45.182) 58.322,46.978

## Polygon pours and split planes (outlines as drawn)
GND on Top Layer "Top Layer-No Net" (solid, remove dead copper, pour order 6): 74.638,71.525 79.15,71.525 cw(c79.101,70.726) 79.9,70.775 81.052,69.528 81.356,32.487 80.416,31.547 58.4,31.547 58.4,36.426 cw(c59.302,36.426) 59.302,37.327 75.303,37.327 ccw(c75.303,39.437) 77.413,39.439 77.41,49.529 ccw(c74.362,49.53) 76.599,51.601 75.972,52.278 cw(c76.745,52.993) 75.692,52.992 75.692,53.487 cw(c76.292,53.488) 75.967,53.992 ccw(c74.653,57.007) 77.898,56.475 77.898,65.956 ccw(c76.861,65.956) 77.609,66.675 73.55,70.9
GND on Top Layer "Top Layer-No Net" (solid, remove dead copper, pour order 8): 67.45,45.075 68.9,45.075 cw(c68.9,45.051) 68.925,45.05 68.925,41.25 cw(c68.176,41.249) 68.175,40.5 51.116,40.5 ccw(c50.928,39.712) 50.5,40.4 49.946,39.621 cw(c49.232,40.333) 49.231,39.325 43.1,39.325 43.1,38.175 42.05,38.175 42.05,41.821 ccw(c41.471,41.821) 41.471,42.4 38.844,42.4 ccw(c38.844,41.996) 38.44,41.996 38.44,36.5 cw(c38.009,36.5) 37.578,36.5 37.578,50.825 cw(c38.009,50.647) 38.44,50.825 38.44,45.687 ccw(c39.057,45.687) 39.052,45.071 40.866,45.057 ccw(c40.873,46.059) 41.875,46.059 41.875,47.15 cw(c42.05,47.15) 42.05,47.325 43.4,47.325 43.4,47.969 45.825,47.968 45.825,44.225 ccw(c47.3,44.225) 47.3,42.75 52.675,42.75 52.675,44.804 54.275,44.804 ccw(c61.318,55.854) 61.311,42.75 67.375,42.75
GND on Top Layer "Top Layer-No Net" (solid, remove dead copper, pour order 2): 1287.826,56.201 1287.821,62.821 cw(c1288.121,62.846) 1287.953,63.096 1278.358,65.663 1288.446,63.146 1288.921,63.146 1289.671,63.146 1290.021,63.446 1290.472,64.672 1291.053,64.911 cw(c1290.246,63.53) 1291.846,63.529 1291.846,60.623 ccw(c1294.384,60.622) 1292.59,58.827 1293.6,58.342 1294.221,58.342 1298.046,58.496 ccw(c1298.003,59.289) 1298.796,59.246 1299.186,60.822 1299.488,60.83 cw(c1299.514,59.347) 1300.996,59.396 ccw(c1313.224,60.092) 1301.076,58.535 cw(c1300.115,58.409) 1300.765,57.691 ccw(c1300.962,57.473) 1300.669,57.454 1300.699,56.955 ccw(c1300.913,56.967) 1300.717,56.881 cw(c1300.585,56.821) 1300.585,56.676 cw(c1300.578,57.281) 1299.988,57.145 ccw(c1298.57,56.824) 1299.796,57.606 1295.546,57.606 1295.546,56.87 cw(c1293.268,56.94) 1295.085,55.565 cw(c1294.497,56.007) 1294.495,55.271 1291.451,55.271 cw(c1291.594,56.117) 1290.877,55.644 1289.146,55.645 1288.871,55.645 1288.377,55.645 cw(c1288.377,56.196)
GND on Bottom Layer "Top Layer-No Net" (solid, remove dead copper, pour order 4): 75.097,71.881 78.825,71.881 cw(c78.825,70.805) 79.9,70.75 81.356,70.6 81.356,32.487 80.416,31.547 60.503,31.547 60.503,34.62 61.724,35.841 77.394,36.115 77.394,48.139 ccw(c76.857,48.114) 76.825,48.65 74.75,48.65 ccw(c74.758,48.309) 74.422,48.255 73.825,48.275 73.85,50.177 74.422,50.177 74.75,50.2 ccw(c74.597,51.32) 75.717,51.473 75.717,60.274 cw(c76.073,60.274) 76.073,60.63 76.252,60.63 76.252,67.555 ccw(c-70.907,30.568)
GND on Bottom Layer "Top Layer-No Net" (solid, remove dead copper, pour order 0): 37.8,47.871 38.806,46.787 53.899,46.787 cw(c53.899,46.025) 54.661,46.025 54.661,38.303 cw(c53.543,38.361) 52.425,38.303 52.425,39.979 ccw(c51.419,40.017) 51.45,41.023 49.253,41.023 ccw(c50.063,37.036) 46.076,37.846 ccw(c360.253,37.152) 46.075,36.628 cw(c45.341,36.625) 45.34,35.89 44.528,35.89 cw(c44.528,36.308) 44.145,36.142 ccw(c42.482,35.565) 42.525,37.325 40.089,37.325 ccw(c42.173,33.641) 38.489,35.725 37.8,35.725

## Other copper
Top Layer:
  rectangle net GND: 46.562,40.503 47.65,41.3
  rectangle net GND: 46.4,39.325 47.425,40
  region net GPIO0: 54.25,36.125 56.25,36.125 56.25,33.775 55.05,33.775 54.25,34.575
  region net GND: 46.834,39.325 46.816,39.325 43.825,39.325 43.825,39.95 46.834,39.95
  region net GND: 46.429,40.564 43.837,40.564 43.837,41.189 46.429,41.189
  region net GND_HLW1: 45.9,63.675 55.875,63.675 ccw(c55.875,64.25) 56.45,64.25 56.45,66.646 ccw(c55.382,66.565) 55.025,67.575 cw(c54.015,71.206) 51.179,68.725 ccw(c46.243,64.478) 46.94,70.952 46.242,71.027 ccw(c46.162,70.289) 45.42,70.289 45.42,64.155 ccw(c45.9,64.155)
  region net +5V: 67.25,67.35 70.475,70.575 72.35,70.575 72.35,70.152 ccw(c75.399,69.788) 75.036,66.739 cw(c74.28,63.755) 77.35,63.985 77.35,63.525 cw(c77.275,63.525) 77.275,63.45 75.35,63.45 ccw(c73.738,63.388) 73.675,65 65.225,65
  region net GND: 74.175,70.25 73.25,71.125 73.5,72.85 74.75,72.85 ccw(c78.438,76.773) 77.35,71.5 75.725,70.25
  region net GND: 44.45,48.703 44.45,53.525 45.3,53.525 cw(c45.3,53) 45.825,53 45.825,47.544 cw(c46.348,50.364) 44.91,47.882 ccw(c43.746,47.768)
  region net LIVE: 39.135,66.738 cw(c52.629,60.665) 41.635,70.57 42.933,72.011 cw(c45.572,69.634) 45.85,73.175 49.775,73.175 ccw(c49.775,73.7) 50.3,73.7 50.3,76.925 ccw(c49.65,76.925) 49.65,77.575 41.097,77.575 ccw(c41.097,75.628) 39.399,76.581 cw(c30.376,78.585) 31.694,69.437 ccw(c31.923,68.995) 31.425,68.994 31.425,66.35 ccw(c31.925,66.35) 31.925,65.85 38.176,65.85 ccw(c38.176,66.811)
  region net NEUTRAL: 35,63.65 32.1,63.65 ccw(c32.1,62.989) 31.439,62.989 31.439,60.911 ccw(c31.75,60.911) 31.75,60.6 35.563,60.6 35.563,63.086 ccw(c35,63.086)
  region net LIVEout: 35.308,80.434 31.848,80.434 ccw(c31.848,80.075) 31.489,80.075 31.489,77.553 ccw(c31.758,77.553) 31.758,77.284 35.298,77.284 ccw(c35.298,77.6) 35.614,77.6 35.614,80.128 ccw(c35.308,80.128)
  region net LIVEout: 31.496,79.825 31.496,83.321 cw(c32.2,83.321) 32.2,84.025 48.902,84.025 cw(c48.902,83.029) 49.897,83.025 ccw(c407.977,81.533) 49.895,80.871 cw(c48.851,80.869) 48.851,79.825 39.2,79.825 ccw(c39.264,75.72) 35.614,77.6
  region net +3V3: 74.55,62.025 74.55,60.175 cw(c73.95,60.175) 73.95,59.575 68.54,59.575 ccw(c68.54,57.035) 66,57.035 66,50.05 cw(c64.425,50.05) 64.425,48.475 64.45,48.5 64.45,60.125 66.35,62.025
  region net +3V3: 64.175,48.55 56.05,48.55 cw(c55.867,52.575) 53.15,49.6 52.775,49.975 53.55,50.75 ccw(c53.588,51.559) 53.625,50.75 cw(c53.636,50.519) 53.791,50.69 ccw(c56.607,53.782) 56.607,49.6 62.887,49.6 ccw(c62.887,51.138) 64.275,50.475 65.225,49.525 65.225,49.325
  region net +5V: 67.625,49.65 cw(c59.549,54.462) 65.317,47.039 ccw(c65.663,46.595) 65.1,46.595 65.1,44.753 66.175,44.7 cw(c67.84,44.903) 66.875,46.275 ccw(c63.069,53.115) 69.6,48.8 69.625,49.725
Bottom Layer:
  region net GND_HLW1: 45.437,65.212 45.437,63.913 ccw(c45.9,63.912) 45.9,63.45 48.275,63.45 48.275,65.65 45.875,65.65 ccw(c45.875,65.212)
  region net GND: 74.423,50.175 71.096,50.175 ccw(c71.096,49.929) 70.85,49.938 ccw(c71.264,49.924) 70.85,49.923 70.85,46.375 74.25,46.375 ccw(c74.25,46.548) 74.423,46.548
  region net GND_HLW1: 54.525,65.4 ccw(c54.239,65.358) 54.518,65.434 cw(c57.763,66.316) 54.676,67.65 cw(c55.59,67.22) 55.492,68.225 59.475,68.225 59.475,66.025 cw(c59.025,66.025) 59.025,65.575 57.125,65.575 ccw(c57.125,65.175) 56.725,65.175 56.725,64.4 ccw(c56.525,64.4) 56.525,64.6 55.25,64.1 cw(c56.008,65.375)
  region net hlwPF: 66.9,50.5 68.051,50.675 cw(c68.051,49.651) 68.775,50.375 cw(c68.232,49.832) 69,49.832 69,48.475 cw(c68.699,48.475) 68.912,48.262 67.869,47.475 66.9,48 ccw(c66.843,49.25)
  region net NEUTRAL: 31.697,63.852 35.157,63.852 cw(c35.157,63.493) 35.516,63.493 35.516,60.97 cw(c35.247,60.97) 35.247,60.702 31.707,60.702 cw(c31.707,61.018) 31.391,61.018 31.391,63.545 cw(c31.697,63.545)
  region net NEUTRAL: 31.775,63.725 41.075,63.725 cw(c41.075,63.375) 41.425,63.375 41.425,60.55 cw(c40.167,60.771) 40.9,59.725 cw(c40.116,60.509) 40.115,59.4 33.68,59.4 32.35,59.4 cw(c32.299,60.323) 31.375,60.35 31.375,63.325 cw(c31.775,63.325)
  region net +3V3: 53.846,49.93 51.816,47.9 cw(c50.03,49.908) 49.873,47.225 40.675,47.225 cw(c40.675,48.191) 39.987,47.513 39.325,48.175 cw(c40.062,49.099) 38.887,48.967 38.887,50.444 39.32,50.444 ccw(c43.38,51.56) 41.298,47.9 49.8,47.9 ccw(c49.8,50.012) 51.294,48.519 53.275,50.5 53.425,50.35
  region net NEUTRALout: 32.063,75.548 ccw(c32.932,103.229) 33.802,75.548 ccw(c34.615,101.432) 35.428,75.548 cw(c34.175,70.971) 36.406,75.16 cw(c31.978,66.411) 37.136,74.75 cw(c30.971,65.537) 41.413,69.257 cw(c-46.411,68.603) 41.413,67.95 cw(c41.407,67.95) 41.4,67.95 cw(c38.794,69.904) 37.314,67.002 ccw(c28.32,62.787) 31.94,72.037 cw(c32.735,72.885) 31.572,72.885 31.572,75.058 cw(c32.063,75.058)
  region net LIVEout: 32.525,77.575 35.153,77.575 ccw(c35.153,78.355) 35.806,77.93 cw(c39.298,75.661) 39.325,79.825 41.903,79.825 ccw(c41.903,80.311) 42.389,80.317 42.364,82.439 ccw(c41.696,82.431) 41.696,83.1 32.75,83.1 ccw(c32.75,82.43) 32.08,82.43 32.08,78.02 ccw(c32.525,78.02)

## Silkscreen, mask and mechanical layers (free items; w line width, h text height)
Top Overlay:
  text "Rev 1.2" at 61.325,34.425 h2
Mechanical 15:
  lines w0.2: 29.975,56.751 29.975,83.305 cw(c31.245,83.305) 31.245,84.575 59.697,84.575 ; 30.85,32.65 cw(c30.85,33.525) 29.975,33.525 29.975,53.915 ; 30.875,32.65 57.709,32.65 ; 60.572,32.641 72.156,32.641 ; 62.56,84.531 69.499,84.531 ; 69.499,84.575 cw(c69.499,73.949) 80.125,73.949 80.125,40.619 cw(c72.156,40.619) 72.156,32.65 ; 29.975,53.915 30.006,53.915 29.975,53.915
  lines w0.254: 30.021,53.858 ccw(c30.825,55.275) 30.046,56.706 ; 57.725,32.672 cw(c59.157,33.376) 60.572,32.641 ; 59.697,84.428 ccw(c61.112,83.693) 62.544,84.397

## Text inside footprints (layer, text, board x,y; h text height)
M1: Top Overlay "in" at 62.589,72.099 h1.52 r180; Top Overlay "out-" at 69.364,72.049 h1.52 r180
P3: Top Overlay "5" at 75.532,49.78 h1.27 r270; Top Overlay "1" at 72.992,49.272 h1.27 r270; Top Overlay "4" at 72.992,37.918 h1.27 r270; Top Overlay "8" at 75.532,37.918 h1.27 r270